# EAGLE board PI3523_EVAL_v2 (EAGLE 9.6.2)
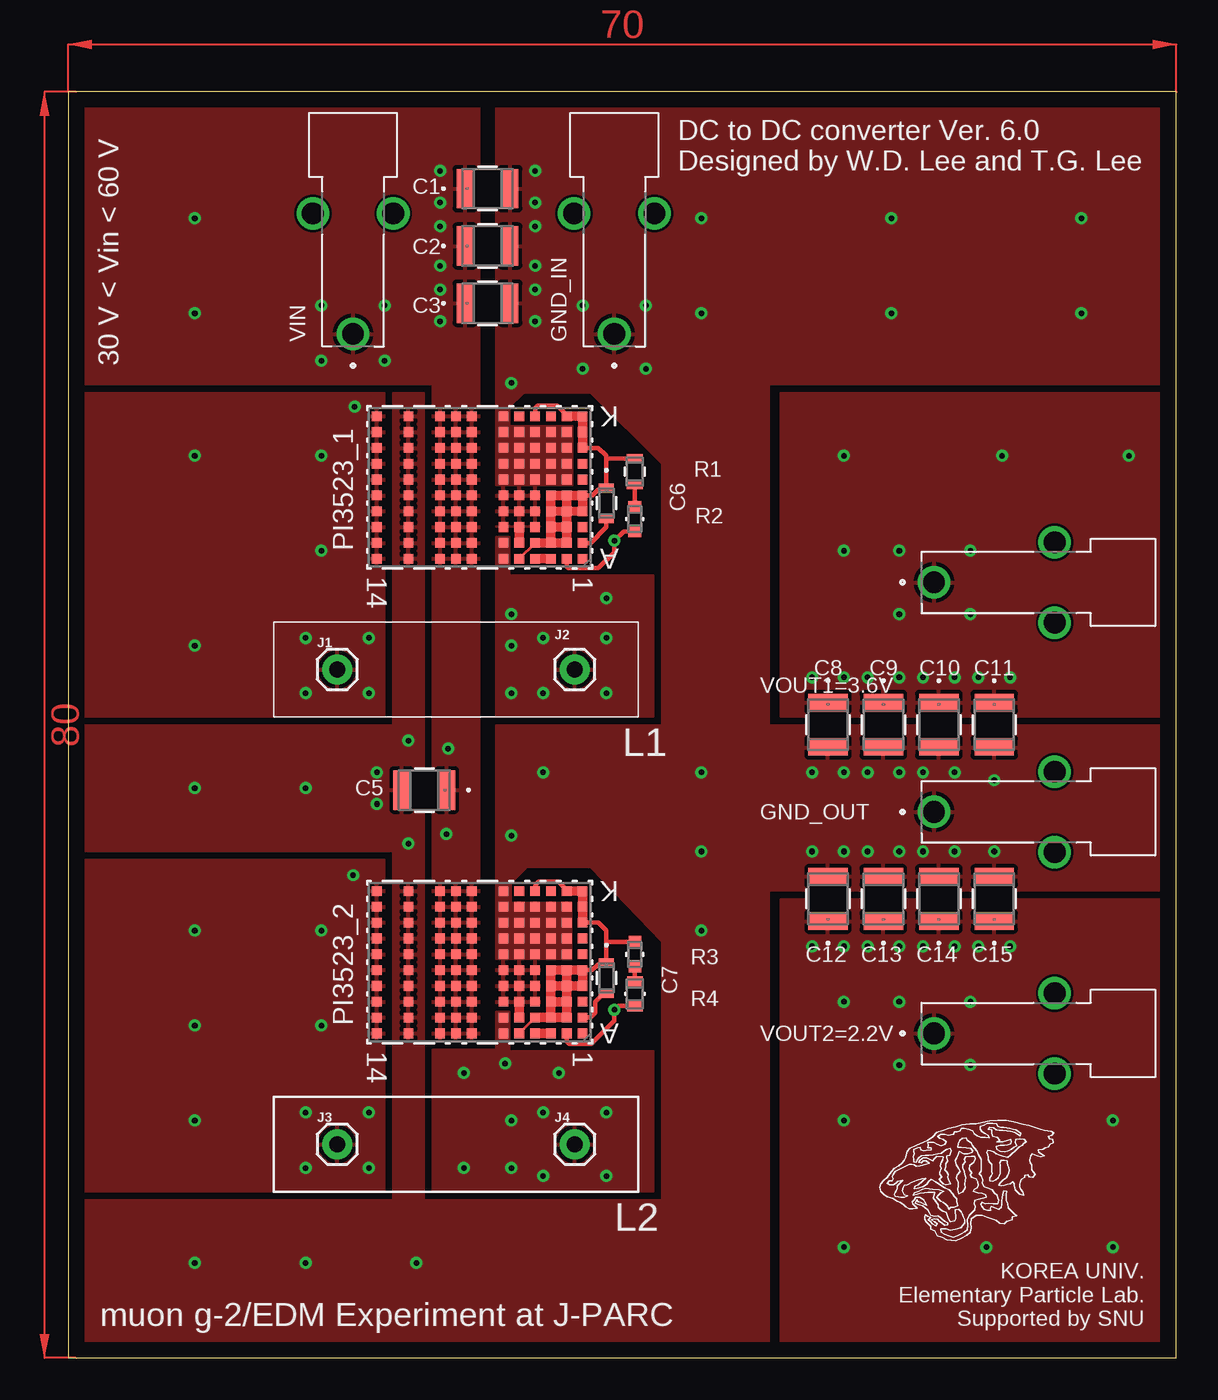
[diagram p0: board, top side]
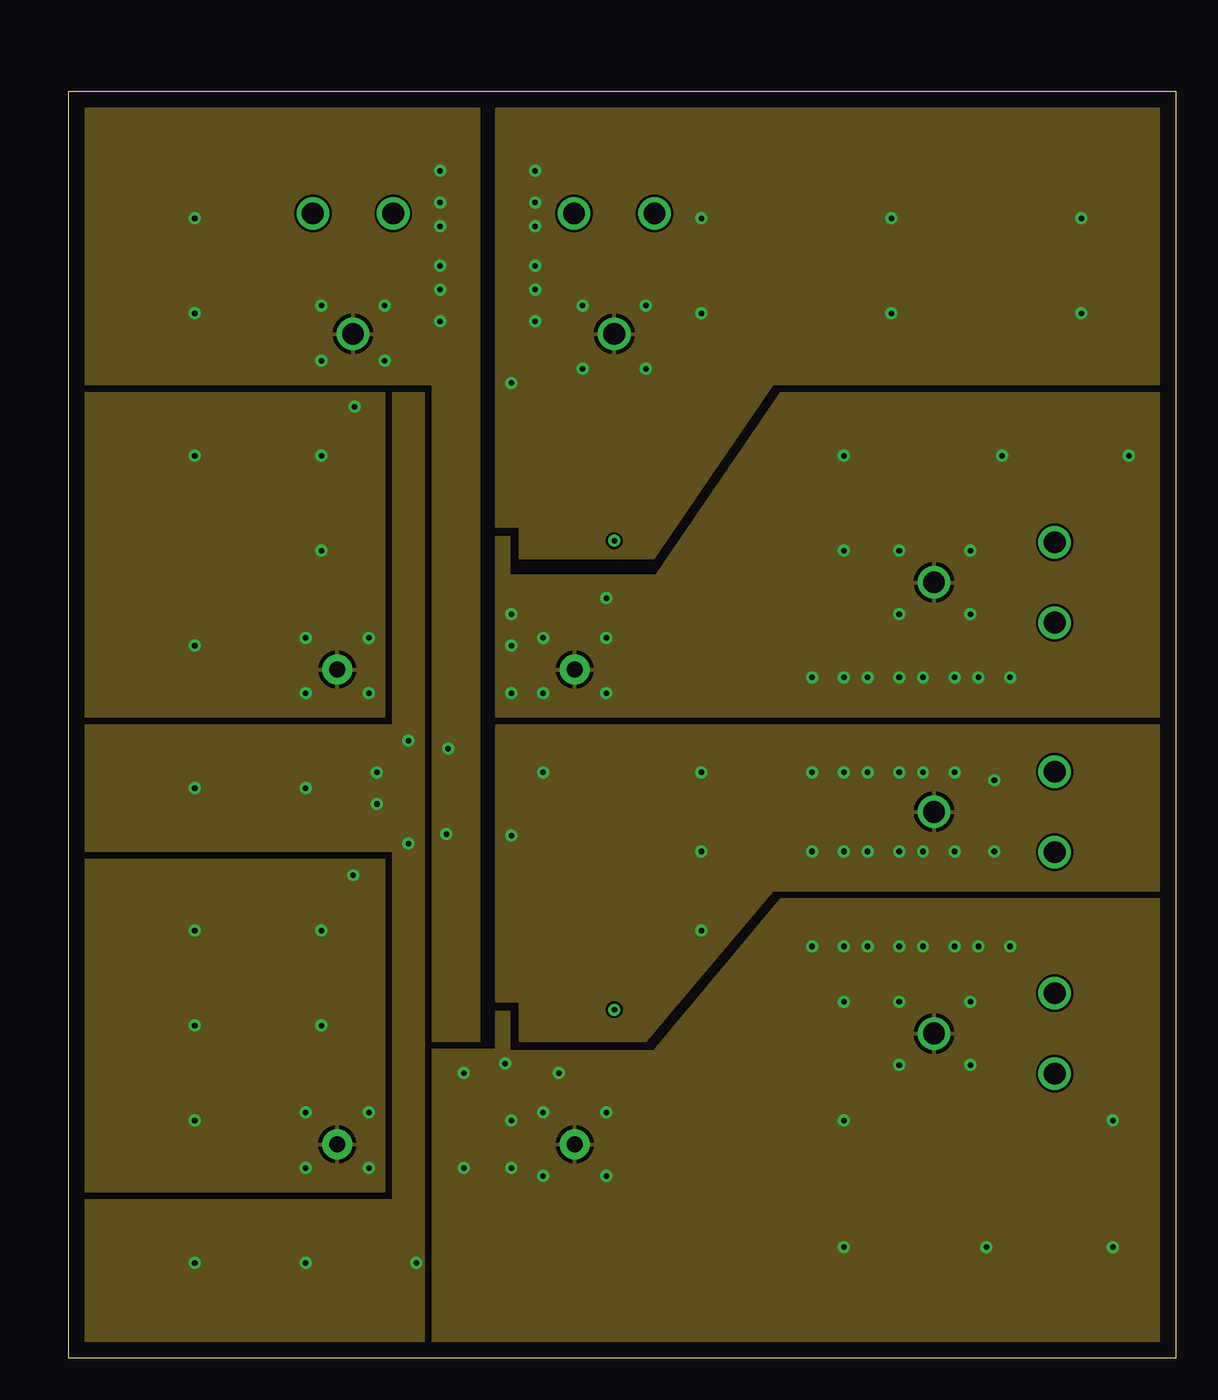
[diagram p1: board, inner layer Route2]
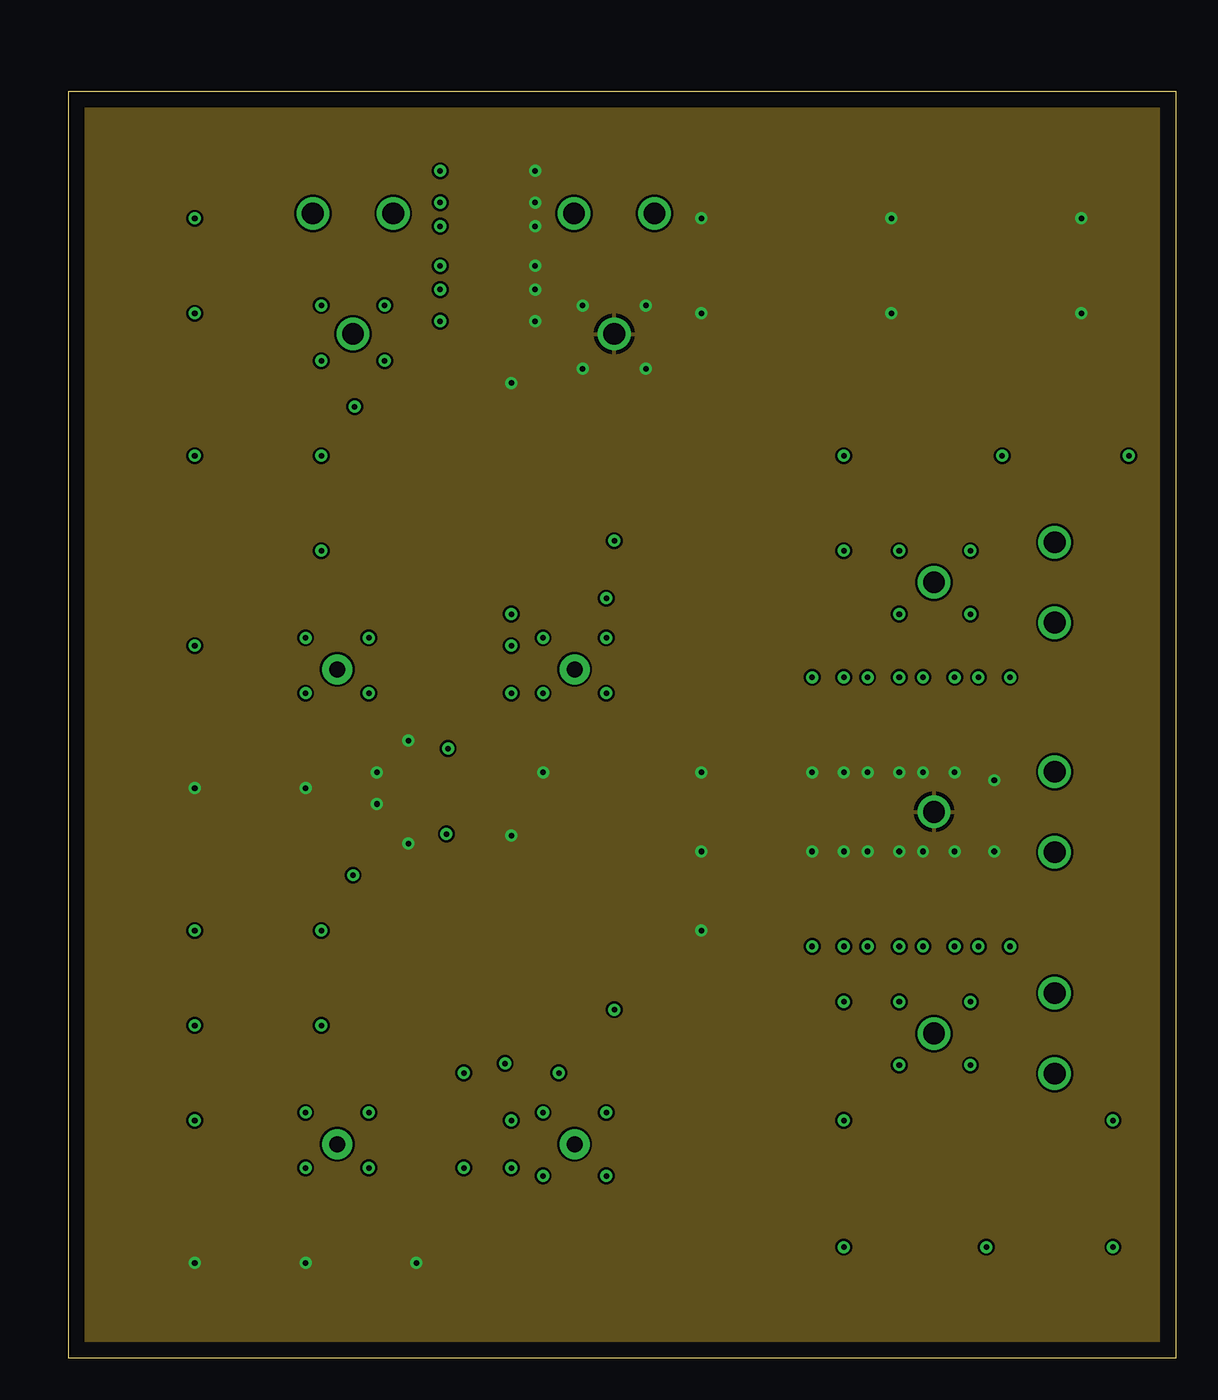
[diagram p2: board, inner layer Route15]
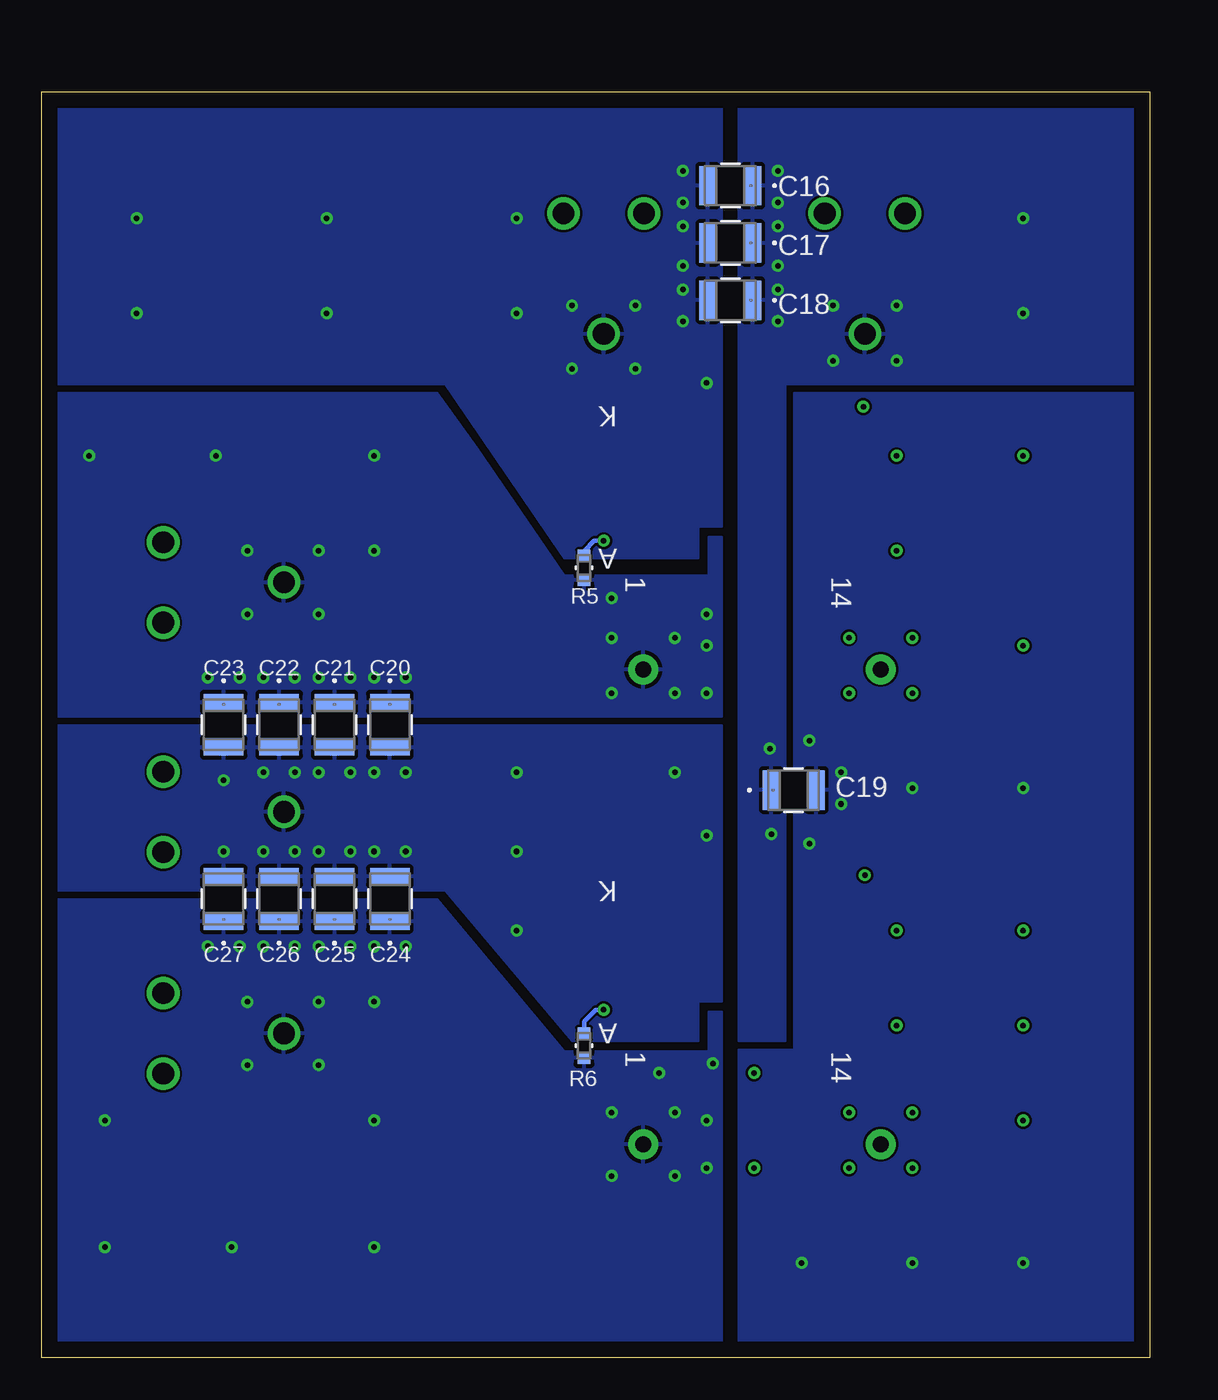
[diagram p3: board, bottom side, seen from below]

Size 70 x 80 mm. Coordinates in mm from the lower left corner, seen from the top.
Outline: 0,80 0,0 70,0 70,80 0,80
Copper layers (1+2*15+16): Top 0.035mm / dielectric 1.5mm / Route2 0.035mm / dielectric 0.15mm / Route15 0.035mm / dielectric 0.2mm / Bottom 0.035mm
Design rules "default *": minimum track width 6mil, minimum drill 0.35mm, track to track 6mil, track to pad 6mil, pad to pad 6mil, via to via 6mil, smd to smd 6mil, copper to edge 40mil, drill to drill 6mil, minimum pad ring 10mil, minimum via ring 8mil, stop-mask expansion 4mil, vias tented up to drill 0mil, thermal gap 10mil

## Footprints (pad centres in the part's own frame; a part is rotated, then mirrored left to right if it is on the bottom)
G-32_MUR = smd 1.061 x 2.489: 1 -1.42,0; 2 1.42,0
CAP_C1608_TDK = smd 0.553 x 0.94: 1 -0.975,0; 2 0.975,0
TE_350180 = drill 1.372: 1 0,0; S1 7.62,2.54; S2 7.62,-2.54
1X01 = drill 1.016 pad 1.88: 1 0,0
LGA_PI3523-00-LGIZ_VIC = smd 0.61 x 0.61: A1 -6.5,4.5; A2 -5.5,4.5; A3 -4.5,4.5; A4 -3.5,4.5; A5 -2.5,4.5; A6 -1.5,4.5; A8 0.5,4.5; A9 1.5,4.5; A10 2.5,4.5; A12 4.5,4.5; A14 6.5,4.5; B1 -6.5,3.5; B2 -5.5,3.5; B3 -4.5,3.5; B4 -3.5,3.5; B5 -2.5,3.5; B6 -1.5,3.5; B8 0.5,3.5; B9 1.5,3.5; B10 2.5,3.5; B12 4.5,3.5; B14 6.5,3.5; C1 -6.5,2.5; C2 -5.5,2.5; C3 -4.5,2.5; C4 -3.5,2.5; C5 -2.5,2.5; C6 -1.5,2.5; C8 0.5,2.5; C9 1.5,2.5; C10 2.5,2.5; C12 4.5,2.5; C14 6.5,2.5; D1 -6.5,1.5; D2 -5.5,1.5; D3 -4.5,1.5; D4 -3.5,1.5; D5 -2.5,1.5; D6 -1.5,1.5; D8 0.5,1.5; D9 1.5,1.5; D10 2.5,1.5; D12 4.5,1.5; D14 6.5,1.5; E1 -6.5,0.5; E2 -5.5,0.5; E3 -4.5,0.5; E4 -3.5,0.5; E5 -2.5,0.5; E6 -1.5,0.5; E8 0.5,0.5; E9 1.5,0.5; E10 2.5,0.5; E12 4.5,0.5; E14 6.5,0.5; F1 -6.5,-0.5; F2 -5.5,-0.5; F3 -4.5,-0.5; F4 -3.5,-0.5; F5 -2.5,-0.5; F6 -1.5,-0.5; F8 0.5,-0.5; F9 1.5,-0.5; F10 2.5,-0.5; F12 4.5,-0.5; F14 6.5,-0.5; G1 -6.5,-1.5; G2 -5.5,-1.5; G3 -4.5,-1.5; G4 -3.5,-1.5; G5 -2.5,-1.5; G6 -1.5,-1.5; G8 0.5,-1.5; G9 1.5,-1.5; G10 2.5,-1.5; G12 4.5,-1.5; G14 6.5,-1.5; H1 -6.5,-2.5; H2 -5.5,-2.5; H3 -4.5,-2.5; H4 -3.5,-2.5; H5 -2.5,-2.5; H6 -1.5,-2.5; H8 0.5,-2.5; H9 1.5,-2.5; H10 2.5,-2.5; H12 4.5,-2.5; H14 6.5,-2.5; J1 -6.5,-3.5; J2 -5.5,-3.5; J3 -4.5,-3.5; J4 -3.5,-3.5; J5 -2.5,-3.5; J6 -1.5,-3.5; J8 0.5,-3.5; J9 1.5,-3.5; J10 2.5,-3.5; J12 4.5,-3.5; J14 6.5,-3.5; K1 -6.5,-4.5; K2 -5.5,-4.5; K3 -4.5,-4.5; K4 -3.5,-4.5; K5 -2.5,-4.5; K6 -1.5,-4.5; K8 0.5,-4.5; K9 1.5,-4.5; K10 2.5,-4.5; K12 4.5,-4.5; K14 6.5,-4.5
RES_0816_SUS = smd 0.55 x 1: 1 -0.825,0; 2 0.825,0
RC0603N_YAG = smd 0.756 x 0.813: 1 -0.772,0; 2 0.772,0
RC0603N_PAN = smd 0.75 x 0.8: 1 -0.775,0; 2 0.775,0
RES_ERA3A_PAN = smd 0.708 x 0.991: 1 -0.748,0; 2 0.748,0

## Placement (x,y rotation side)
C1  GRM32ER72A225KA35L  [G-32_MUR]  26.5,73.88 0 top
C2  GRM32ER72A225KA35L  [G-32_MUR]  26.5,70.26 0 top
C3  GRM32ER72A225KA35L  [G-32_MUR]  26.5,66.64 0 top
C5  GRM32ER72A225KA35L  [G-32_MUR]  22.5,35.88 180 top
C6  C1608C0G2A472J080AC  [CAP_C1608_TDK]  34,54 270 top
C7  C1608C0G2A472J080AC  [CAP_C1608_TDK]  34,24 270 top
C8  GRM32EC80J107ME20L  [G-32_MUR]  48,40 270 top
C9  GRM32EC80J107ME20L  [G-32_MUR]  51.5,40 270 top
C10  GRM32EC80J107ME20L  [G-32_MUR]  55,40 270 top
C11  GRM32EC80J107ME20L  [G-32_MUR]  58.5,40 270 top
C12  GRM32EC80J107ME20L  [G-32_MUR]  48,29 90 top
C13  GRM32EC80J107ME20L  [G-32_MUR]  51.5,29 90 top
C14  GRM32EC80J107ME20L  [G-32_MUR]  55,29 90 top
C15  GRM32EC80J107ME20L  [G-32_MUR]  58.5,29 90 top
C16  GRM32ER72A225KA35L  [G-32_MUR]  26.5,74.07 180 bottom
C17  GRM32ER72A225KA35L  [G-32_MUR]  26.5,70.45 180 bottom
C18  GRM32ER72A225KA35L  [G-32_MUR]  26.5,66.83 180 bottom
C19  GRM32ER72A225KA35L  [G-32_MUR]  22.5,35.88 0 bottom
C20  GRM32EC80J107ME20L  [G-32_MUR]  48,40 270 bottom
C21  GRM32EC80J107ME20L  [G-32_MUR]  51.5,40 270 bottom
C22  GRM32EC80J107ME20L  [G-32_MUR]  55,40 270 bottom
C23  GRM32EC80J107ME20L  [G-32_MUR]  58.5,40 270 bottom
C24  GRM32EC80J107ME20L  [G-32_MUR]  48,29 90 bottom
C25  GRM32EC80J107ME20L  [G-32_MUR]  51.5,29 90 bottom
C26  GRM32EC80J107ME20L  [G-32_MUR]  55,29 90 bottom
C27  GRM32EC80J107ME20L  [G-32_MUR]  58.5,29 90 bottom
GND_IN  350180  [TE_350180]  34.5,64.7 90 top
GND_OUT  350180  [TE_350180]  54.7,34.5 0 top
J1  [1X01]  17,43.5 0 top
J2  [1X01]  32,43.5 0 top
J3  [1X01]  17,13.5 0 top
J4  [1X01]  32,13.5 0 top
PI3523_1  PI3523-00-LGIZ  [LGA_PI3523-00-LGIZ_VIC]  26,55 180 top
PI3523_2  PI3523-00-LGIZ  [LGA_PI3523-00-LGIZ_VIC]  26,25 180 top
R1  RL0816S-2R2-F  [RES_0816_SUS]  35.8,56 270 top
R2  RT0603BRD072K7L  [RC0603N_YAG]  35.8,53 90 top
R3  ERJ-3EKF12R4V  [RC0603N_PAN]  35.8,25.5 90 top
R4  ERA-3AEB1241V  [RES_ERA3A_PAN]  35.8,23 270 top
R5  RT0603BRE072K4L  [RC0603N_YAG]  35.74,49.91 90 bottom
R6  RT0603BRE072K4L  [RC0603N_YAG]  35.74,19.73 90 bottom
VIN  350180  [TE_350180]  18,64.7 90 top
VOUT1=3.6V  350180  [TE_350180]  54.7,49 0 top
VOUT2=2.2V  350180  [TE_350180]  54.7,20.5 0 top

## Library data of the parts
C1-C3 C5 C16-C19 = PI3523_1_1_ul_GRM32ER72A225KA35L; COPYRIGHT: Copyright (C) 2015 Accelerated Designs. All rights reserved; MANUFACTURER_PART_NUMBER: GRM32ER72A225KA35L; SOURCELIBRARY: Murata_2014-12-31; VENDOR: Murata
C6 C7 = PI3523_1_3_ul_C1608C0G2A472J080AC; BUILT_BY: EMA_Matt; COPYRIGHT: Copyright (C) 2018 Accelerated Designs. All rights reserved; MANUFACTURER_PART_NUMBER: C1608C0G2A472J080AC; SOURCELIBRARY: TDK_2019-10-09; VENDOR: TDK
C8-C15 C20-C27 = PI3523_C_back; COPYRIGHT: Copyright (C) 2015 Accelerated Designs. All rights reserved; MANUFACTURER_PART_NUMBER: GRM32EC80J107ME20L; SOURCELIBRARY: Murata_2014-12-31; VENDOR: Murata
GND_IN GND_OUT VIN VOUT1=3.6V VOUT2=2.2V = PI3523_banana_connector_350180; AVAILABILITY: Good; COMMENT: 350180; DESCRIPTION: Connector TeStraight Probe RCP 3 Position Solder Right Angle Thru-Hole 1 Port; MF: TE Connectivity; MP: 350180; PACKAGE: None; PRICE: None; PURCHASE-URL: https://pricing.snapeda.com/search/part/350180/?ref=eda
J1-J4 = SparkFun-Connectors
PI3523_1 PI3523_2 = PI3523_00LGIZ; BUILT_BY: EMA_Justin; COPYRIGHT: Copyright (C) 2018 Accelerated Designs. All rights reserved; MANUFACTURER_PART_NUMBER: PI3523-00-LGIZ; SOURCELIBRARY: Add_to_database_2021-01-28; VENDOR: Vicor
R1 = PI3523_R3.6_2; BUILT_BY: EMA_UL_Team; MANUFACTURER_PART_NUMBER: RL0816S-2R2-F; SOURCELIBRARY: Susumu_2015_05_08; VENDOR: Susumu
R2 = PI3523_R3.6_1; BUILT_BY: EMA_UL_Team; MANUFACTURER_PART_NUMBER: RT0603BRD072K7L; SOURCELIBRARY: Yageo_2008-01-01_ChipRes2b; VENDOR: Yageo
R3 = PI3523_R2_2; BUILT_BY: EMA_UL_Team; MANUFACTURER_PART_NUMBER: ERJ-3EKF12R4V; SOURCELIBRARY: Panasonic_2010-01-01_Res5; VENDOR: Panasonic
R4 = PI3523_R2_1; BUILT_BY: EMA_Cory; COPYRIGHT: Copyright (C) 2018 Accelerated Designs. All rights reserved; MANUFACTURER_PART_NUMBER: ERA-3AEB1241V; SOURCELIBRARY: Panasonic_2019-12-05; VENDOR: Panasonic
R5 R6 = PI3523_R210; BUILT_BY: EMA_UL_Team; MANUFACTURER_PART_NUMBER: RT0603BRE072K4L; SOURCELIBRARY: Yageo_2008-01-01_ChipRes3a; VENDOR: Yageo

## Nets
COMP: C6.2 PI3523_1.B1
COMP2: C7.2 PI3523_2.B1
EAIN: PI3523_1.A2 R2.1 R5.2
EAIN2: PI3523_2.A2 R4.2 R6.2
N$3: R3.1 R4.1
N$10: PI3523_2.A3 PI3523_2.A4
N$11: PI3523_1.A3 PI3523_1.A4
N$12: PI3523_1.K5
N$13: PI3523_1.K3
N$14: PI3523_1.F1
N$15: PI3523_1.C1
N$16: PI3523_1.A1
N$18: PI3523_2.A1
N$19: PI3523_2.C1
N$20: PI3523_2.K3
N$21: PI3523_2.K5
N$22: PI3523_2.F1
PGND [New Class]: C1.2 C2.2 C3.2 C5.2 C8.2 C9.2 C10.2 C11.2 C12.2 C13.2 C14.2 C15.2 C16.2 C17.2 C18.2 C19.2 C20.2 C21.2 C22.2 C23.2 C24.2 C25.2 C26.2 C27.2 GND_IN.1 GND_OUT.1 PI3523_1.A12 PI3523_1.B5 PI3523_1.B12 PI3523_1.C4 PI3523_1.C5 PI3523_1.C6 PI3523_1.C12 PI3523_1.D4 PI3523_1.D5 PI3523_1.D6 PI3523_1.D12 PI3523_1.E4 PI3523_1.E5 PI3523_1.E6 PI3523_1.E12 PI3523_1.F2 PI3523_1.F3 PI3523_1.F4 PI3523_1.F5 PI3523_1.F6 PI3523_1.F12 PI3523_1.G2 PI3523_1.G3 PI3523_1.G4 PI3523_1.G5 PI3523_1.G6 PI3523_1.G12 PI3523_1.H2 PI3523_1.H3 PI3523_1.H4 PI3523_1.H5 PI3523_1.H6 PI3523_1.H12 PI3523_1.J2 PI3523_1.J3 PI3523_1.J4 PI3523_1.J5 PI3523_1.J6 PI3523_1.J12 PI3523_1.K6 PI3523_1.K12 PI3523_2.A12 PI3523_2.B5 PI3523_2.B12 PI3523_2.C4 PI3523_2.C5 PI3523_2.C6 PI3523_2.C12 PI3523_2.D4 PI3523_2.D5 PI3523_2.D6 PI3523_2.D12 PI3523_2.E4 PI3523_2.E5 PI3523_2.E6 PI3523_2.E12 PI3523_2.F2 PI3523_2.F3 PI3523_2.F4 PI3523_2.F5 PI3523_2.F6 PI3523_2.F12 PI3523_2.G2 PI3523_2.G3 PI3523_2.G4 PI3523_2.G5 PI3523_2.G6 PI3523_2.G12 PI3523_2.H2 PI3523_2.H3 PI3523_2.H4 PI3523_2.H5 PI3523_2.H6 PI3523_2.H12 PI3523_2.J2 PI3523_2.J3 PI3523_2.J4 PI3523_2.J5 PI3523_2.J6 PI3523_2.J12 PI3523_2.K6 PI3523_2.K12
R21_1: R1.2 R2.2
SGND: C6.1 PI3523_1.A5 PI3523_1.B2 PI3523_1.B3 PI3523_1.B4 PI3523_1.C2 PI3523_1.C3 PI3523_1.D1 PI3523_1.D2 PI3523_1.D3 PI3523_1.E1 PI3523_1.E2 PI3523_1.E3 PI3523_1.H1 PI3523_1.J1 PI3523_1.K1 PI3523_1.K2 PI3523_1.K4 R1.1
SGND2: C7.1 PI3523_2.A5 PI3523_2.B2 PI3523_2.B3 PI3523_2.B4 PI3523_2.C2 PI3523_2.C3 PI3523_2.D1 PI3523_2.D2 PI3523_2.D3 PI3523_2.E1 PI3523_2.E2 PI3523_2.E3 PI3523_2.H1 PI3523_2.J1 PI3523_2.K1 PI3523_2.K2 PI3523_2.K4 R3.2
VIN: C1.1 C2.1 C3.1 C5.1 C16.1 C17.1 C18.1 C19.1 PI3523_1.A8 PI3523_1.A9 PI3523_1.A10 PI3523_1.B8 PI3523_1.B9 PI3523_1.B10 PI3523_1.C8 PI3523_1.C9 PI3523_1.C10 PI3523_1.D8 PI3523_1.D9 PI3523_1.D10 PI3523_1.E8 PI3523_1.E9 PI3523_1.E10 PI3523_1.F8 PI3523_1.F9 PI3523_1.F10 PI3523_1.G8 PI3523_1.G9 PI3523_1.G10 PI3523_1.H8 PI3523_1.H9 PI3523_1.H10 PI3523_1.J8 PI3523_1.J9 PI3523_1.J10 PI3523_1.K8 PI3523_1.K9 PI3523_1.K10 PI3523_2.A8 PI3523_2.A9 PI3523_2.A10 PI3523_2.B8 PI3523_2.B9 PI3523_2.B10 PI3523_2.C8 PI3523_2.C9 PI3523_2.C10 PI3523_2.D8 PI3523_2.D9 PI3523_2.D10 PI3523_2.E8 PI3523_2.E9 PI3523_2.E10 PI3523_2.F8 PI3523_2.F9 PI3523_2.F10 PI3523_2.G8 PI3523_2.G9 PI3523_2.G10 PI3523_2.H8 PI3523_2.H9 PI3523_2.H10 PI3523_2.J8 PI3523_2.J9 PI3523_2.J10 PI3523_2.K8 PI3523_2.K9 PI3523_2.K10 VIN.1
VOUT: C8.1 C9.1 C10.1 C11.1 C20.1 C21.1 C22.1 C23.1 J2.1 PI3523_1.A6 PI3523_1.B6 R5.1 VOUT1=3.6V.1
VOUT2: C12.1 C13.1 C14.1 C15.1 C24.1 C25.1 C26.1 C27.1 J4.1 PI3523_2.A6 PI3523_2.B6 R6.1 VOUT2=2.2V.1
VS1: J1.1 PI3523_1.A14 PI3523_1.B14 PI3523_1.C14 PI3523_1.D14 PI3523_1.E14 PI3523_1.F14 PI3523_1.G14 PI3523_1.H14 PI3523_1.J14 PI3523_1.K14
VS12: J3.1 PI3523_2.A14 PI3523_2.B14 PI3523_2.C14 PI3523_2.D14 PI3523_2.E14 PI3523_2.F14 PI3523_2.G14 PI3523_2.H14 PI3523_2.J14 PI3523_2.K14

## Tracks (layer width: path | path; a pad name or v marks a point on that pad's centre or on a via)
COMP
  Top 0.3: PI3523_1.B1 33,51.5 34,52.5 C6.2
COMP2
  Top 0.3: PI3523_2.B1 33,21.5 33.3,21.8 33.3,22.5 33.83,23.02 C7.2
EAIN  (via drill 0.35)
  Top 0.3: PI3523_1.A2 31.5,50 31.61,49.89 33.49,49.89 34.5,50.9 v34.5,51.63 35.1,52.23 R2.1
  Bottom 0.3: R5.2 35.74,50.99 35.1,51.63 v34.5,51.63
EAIN2  (via drill 0.35)
  Top 0.3: PI3523_2.A2 31.5,20 31.66,19.84 33.05,19.84 34.5,21.3 v34.5,22 34.75,22.25 R4.2
  Bottom 0.3: v34.5,22 35,22 35.74,21.26 R6.2
N$3
  Top 0.3: R4.1 R3.1
N$10
  Top 0.6: PI3523_2.A4 PI3523_2.A3
N$11
  Top 0.6: PI3523_1.A4 PI3523_1.A3
PGND  (via drill 0.35, 0.35 pad 0.55)
  Top 0.6: PI3523_1.C5 PI3523_1.B5 | PI3523_2.C5 PI3523_2.B5
  other vias: 29.5,75 29.5,73 29.5,71.5 29.5,69 29.5,67.5 29.5,65.5 28,61.6 32.5,66.5 32.5,62.5 36.5,66.5 36.5,62.5 40,66 40,72 52,72 52,66 64,66 64,72 30,37 28,33 40,37 40,32 40,27 22,6 15,6 8,6 47,37 49,37 50.5,37 52.5,37 54,37 56,37 47,32 49,32 50.5,32 52.5,32 54,32 56,32 21.5,32.5 19.5,35 19.5,37 21.5,39 15,36 8,36 58.5,36.5 58.5,32
  pour Route15: 0,80 0,0 70,0 70,80
  pour Top (no thermals): 27,55.12 31.87,55.12 31.87,58.91 27,58.91
  pour Top: 22.5,61 20.5,61 20.5,40 0,40 0,32 20.5,32 20.5,10 0,10 0,0 44.29,0 44.29,29.5 70,29.5 70,40 44.29,40 44.29,61.5 70,61.5 70,80 27,80 27,52.5 29.82,52.5 29.82,55.5 31.5,55.5 31.5,58.5 27.79,58.5 27.79,60 28.77,60.98 33.02,60.98 37.5,56.5 37.5,40 27,40 27,22.29 29.82,22.29 29.82,25.18 31.82,25.18 31.82,28.82 27.77,28.82 27.77,29.78 28.98,31 33.02,31 37.5,26.3 37.5,10 22.5,10
  pour Bottom: 70,40 27,40 27,22.5 28.5,22.5 28.5,20 36.5,20 44.5,29.5 70,29.5
  pour Bottom: 27,52.5 27,80 70,80 70,61.5 44.5,61.5 37,50.5 28.5,50.5 28.5,52.5
  pour Bottom: 0,61 22.5,61 22.5,19.5 26,19.5 26,0 0,0
  pour Route2: 70,29.5 44.5,29.5 36.5,20 28.5,20 28.5,22.5 27,22.5 27,40 70,40
  pour Route2: 70,61.5 44.5,61.5 37,50.5 28.5,50.5 28.5,52.5 27,52.5 27,80 70,80
  pour Route2: 22.5,61 20.5,61 20.5,40 0,40 0,32 20.5,32 20.5,10 0,10 0,0 22.5,0
  pour Top (no thermals): 27,28.79 27,25.18 31.82,25.18 31.82,28.79
  pour Top (no thermals): 27,30.1 27,28.7 28,28.7 28,30.1
  pour Top (no thermals): 27,60.2 27,58.8 27.9,58.8 27.9,60.2
R21_1
  Top 0.3: R2.2 R1.2
SGND
  Top 0.152: PI3523_1.B3 | PI3523_1.C3 30.5,52.48 | PI3523_1.D3 | PI3523_1.D2 | PI3523_1.E2 31.5,54.48 | PI3523_1.E3 30.5,54.48
  Top 0.2: PI3523_1.A5 PI3523_1.B4
  Top 0.3: PI3523_1.K4 29.5,60 29.66,60.16 30.89,60.16 31.55,59.5 | PI3523_1.E1 33.11,54.5 33.49,54.87 33.9,54.87 C6.1 34,56.75 | 34,56.75 34,57 33.5,57.5 PI3523_1.H1 | R1.1 34.08,56.83 34,56.75
  Top 0.6: PI3523_1.B4 PI3523_1.B3 | PI3523_1.C2 PI3523_1.B2 PI3523_1.B3 30.5,52.48 | PI3523_1.C2 PI3523_1.C3 PI3523_1.D3 | PI3523_1.C2 PI3523_1.D2 PI3523_1.D3 30.5,54.48 | PI3523_1.E2 PI3523_1.E3 | PI3523_1.K2 31.55,59.5 PI3523_1.K1 PI3523_1.J1 PI3523_1.H1 | PI3523_1.D2 PI3523_1.D1 PI3523_1.E1 32.48,54.48 31.5,54.48 PI3523_1.D2
SGND2
  Top 0.2: PI3523_2.A5 PI3523_2.B4
  Top 0.3: PI3523_2.H1 33.5,27.5 34,27 34,26.25 | PI3523_2.K4 29.5,29.86 29.74,30.11 30.95,30.11 31.55,29.5 | PI3523_2.E1 33.11,24.5 33.49,24.87 33.9,24.87 C7.1 34,26.25 | R3.2 34.02,26.27 34,26.25
  Top 0.6: PI3523_2.E2 PI3523_2.E3 PI3523_2.D3 | PI3523_2.D2 PI3523_2.D3 | PI3523_2.D3 PI3523_2.C3 | PI3523_2.C3 PI3523_2.C2 | PI3523_2.D2 PI3523_2.C2 | PI3523_2.C2 PI3523_2.B2 PI3523_2.B3 | PI3523_2.B3 PI3523_2.C3 | PI3523_2.B3 PI3523_2.B4 | PI3523_2.D2 PI3523_2.D1 PI3523_2.E1 PI3523_2.E2 | PI3523_2.E2 PI3523_2.D2 | PI3523_2.K2 31.55,29.5 PI3523_2.K1 PI3523_2.J1 PI3523_2.H1
VIN  (via drill 0.35)
  other vias: 8,66 8,72 20,66.5 16,66.5 20,63 23.5,65.5 23.5,67.5 23.5,69 23.5,71.5 23.5,73 23.5,75 24,38.5 23.9,33.1 16,63
  pour Top: 23,20 26,20 26,80 23,80
  pour Top: 23,61.5 0,61.5 0,80 23,80
  pour Bottom: 26,80 0,80 0,61.5 23,61.5 23,20 26,20
  pour Route2: 26,80 0,80 0,61.5 23,61.5 23,20 26,20
VOUT  (via drill 0.35)
  other vias: 28,47 49,43 47,43 34,42 30,42 28,42 28,45 30,45.5 34,48 34,45.5 49,57 59,57 67,57 49,51 52.5,51 57,51 52.5,47 57,47 50.5,43 52.5,43 54,43 56,43 57.5,43 59.5,43
  pour Top: 27,51.9 27.9,51.9 27.9,49.48 37,49.48 37,40.5 27,40.5
  pour Top: 44.98,61 70,61 70,40.5 44.98,40.5
  pour Bottom: 70,61 45,61 42.5,57.5 37,49.48 27.9,49.48 27.9,51.9 27,51.9 27,40.5 70,40.5
  pour Route2: 70,40.5 27,40.5 27,51.9 27.9,51.9 27.9,49.48 37.14,49.48 45,61 44.99,61.01 70,61
  pour Top (no thermals): 27,49.9 27,51.9 27.9,51.9 27.9,49.73
VOUT2  (via drill 0.35)
  other vias: 27.6,18.6 25,18 25,12 28,15 28,12 31,18 30,15.5 30,11.5 34,11.5 34,15.5 47,26 49,26 50.5,26 52.5,26 54,26 56,26 57.5,26 59.5,26 49,22.5 52.5,22.5 57,22.5 52.5,18.5 57,18.5 49,15 66,15 58,7 49,7 66,7
  pour Top: 44.98,29 70,29 70,0 44.98,0
  pour Top: 27.9,21.9 27,21.9 27,19.5 23,19.5 23,10.5 37,10.5 37,19.4 27.9,19.4
  pour Bottom: 70,0 70,29 45,29 37,19.4 27.9,19.4 27.9,21.9 27,21.9 27,0
  pour Route2: 70,29 45,29 37,19.4 27.9,19.4 27.9,21.9 27,21.9 27,19.5 23,19.5 23,0 70,0
  pour Top (no thermals): 27,19.6 27,21.9 27.9,21.9 27.9,19.6
VS1  (via drill 0.35)
  other vias: 18.1,60.1 16,57 8,57 16,51 8,45 15,45.5 15,42 19,45.5 19,42
  pour Top: 20,40.5 0,40.5 0,61 20,61
  pour Route2: 0,40.5 20,40.5 20,61 0,61
VS12  (via drill 0.35)
  other vias: 18,30.5 8,27 16,27 16,21 8,21 8,15 15,15.5 15,12 19,15.5 19,12
  pour Top: 20,10.5 0,10.5 0,31.5 20,31.5
  pour Route2: 0,31.5 20,31.5 20,10.5 0,10.5
(copper drawn outside any net)
  shapes: Top area x2

## Text on the board
tNames: DC to DC converter Ver. 6.0 / Designed by W.D. Lee and T.G. Lee | 30 V < Vin < 60 V | L1 | L2 | KOREA UNIV. / Elementary Particle Lab. / Supported by SNU | muon g-2/EDM Experiment at J-PARC